# EAGLE board testeserra1 (EAGLE 9.7.0)
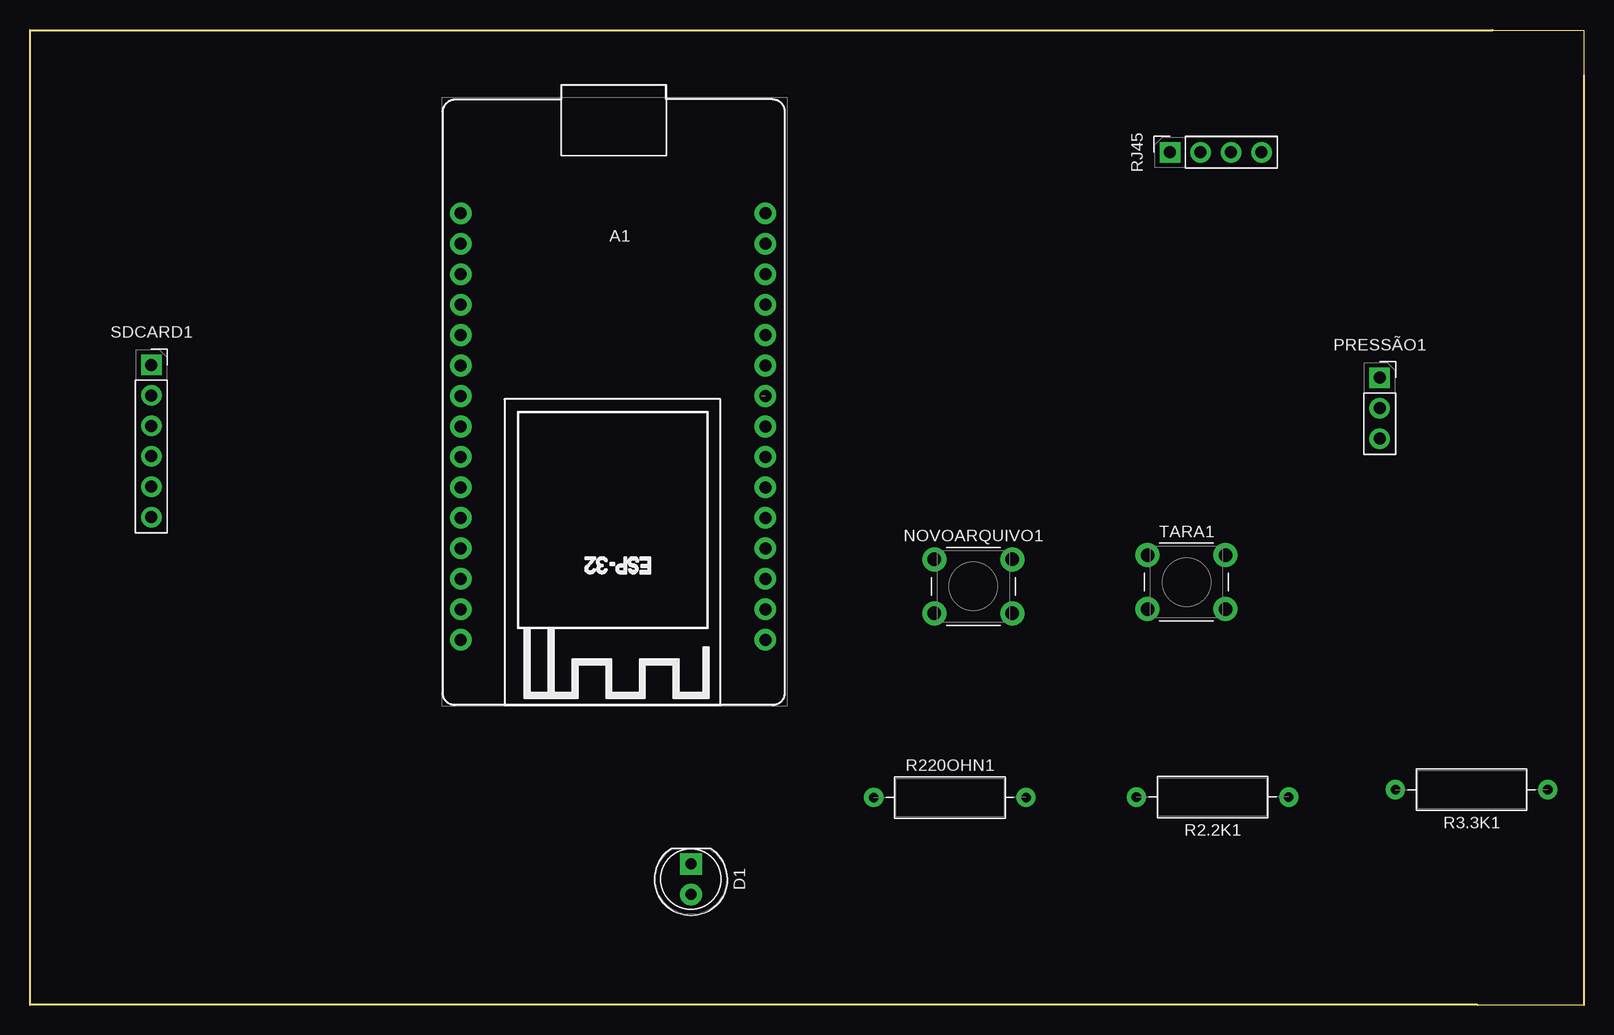
[diagram p0: board, top side]
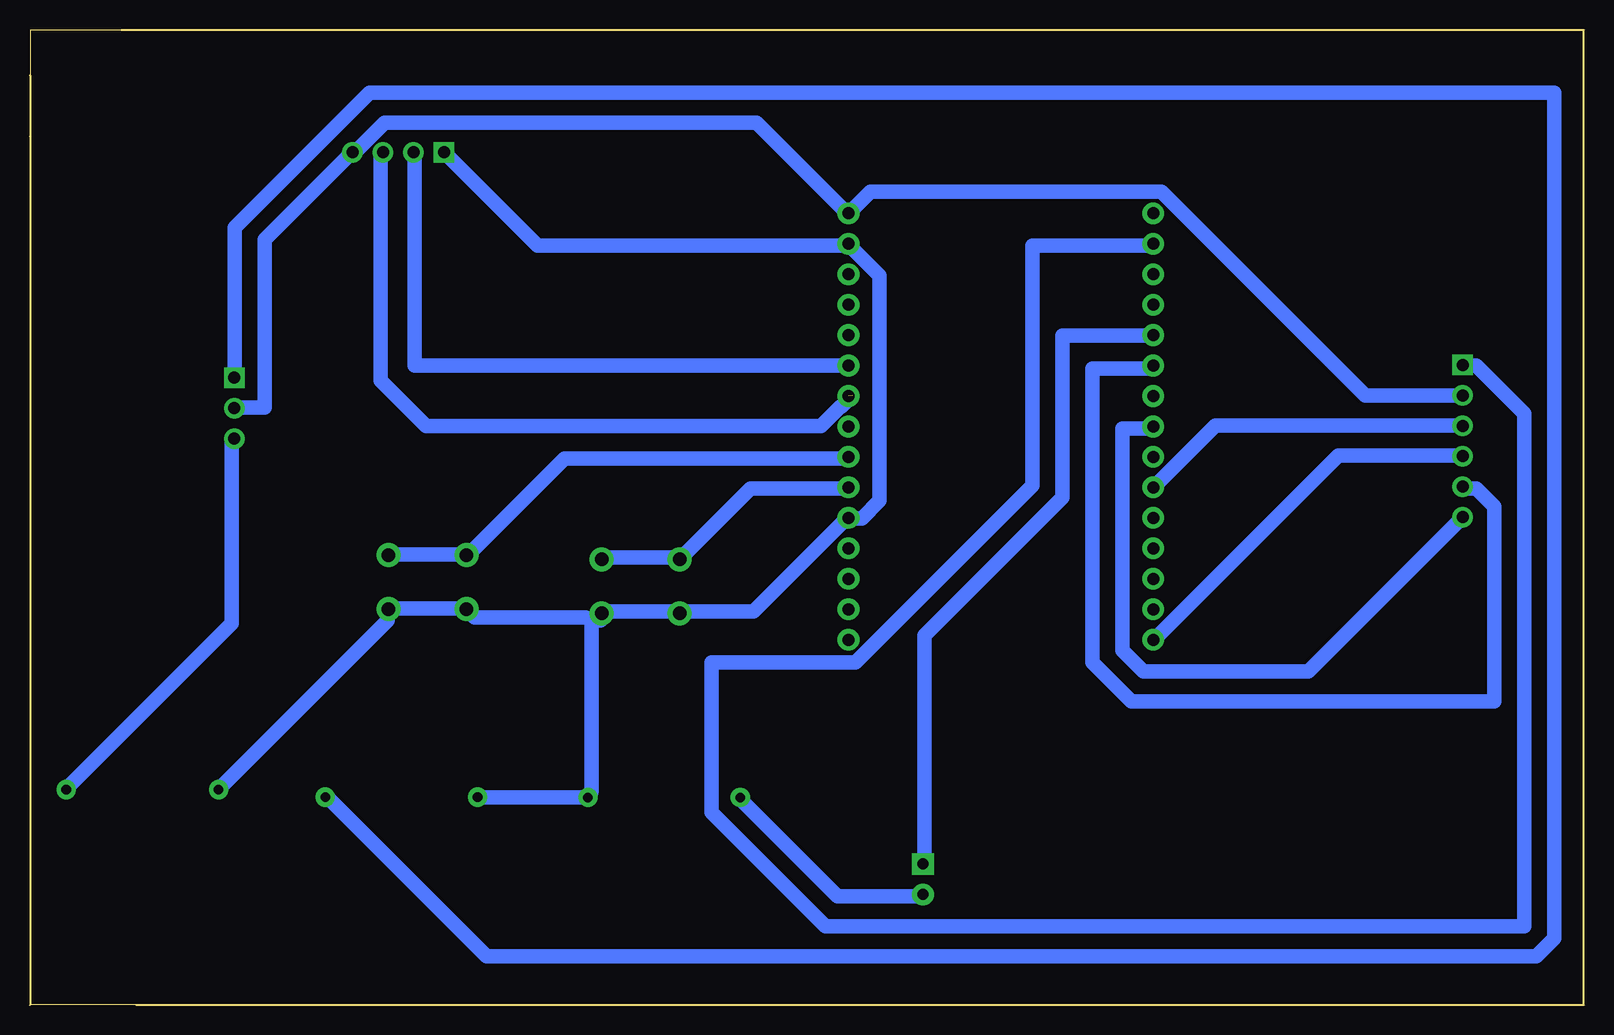
[diagram p1: board, bottom side, seen from below]

Size 129.54 x 81.28 mm. Coordinates in mm from the lower left corner, seen from the top.
Outline: 129.54,77.47 129.54,72.39
Outline: 129.54,72.39 129.54,0 120.65,0 0,0 0,81.28 121.92,81.28 129.54,81.28 129.54,72.39
Copper layers (1*16): Top / Bottom
Stack-up Default Layer Stack: Top SilkScreen Epoxy Ink / Top SolderMask SR:Green 0.0254mm Dk 4.3 / Top Surface Finish Lead-Free 0.02mm / Top CuFoil:007 0.035mm / Dielectric-1 User Defined 1.5mm / Bottom CuFoil:007 0.035mm / Bottom Surface Finish Lead-Free 0.02mm / Bottom SolderMask SR:Green 0.0254mm Dk 4.3 / Bottom SilkScreen Epoxy Ink
Design rules: minimum copper width 1.2mm, minimum drill size 0.35mm, copper clearance wire_polygon to wire_polygon 0.6mm, copper clearance wire_polygon to pad_smd 6mil, copper clearance wire_polygon to via 6mil, copper clearance pad_smd to pad_smd 0.6mm, copper clearance pad_smd to via 6mil, copper clearance via to via 6mil, copper clearance smd to pad (same net) 6mil, copper clearance smd to via (same net) 6mil, copper clearance smd to smd (same net) 6mil, dimension clearance 40mil, via restrict clearance 0mil, restrict clearance 0mil, drill distance 6mil, keepout clearance 0mil

## Footprints (pad centres in the part's own frame; a part is rotated, then mirrored left to right if it is on the bottom)
DOIT_ESP32_DEVKIT_30PINS = drill 1 pad 1.8: 1 0,0; 2 0,-2.54; 3 0,-5.08; 4 0,-7.62; 5 0,-10.16; 6 0,-12.7; 7 0,-15.24; 8 0,-17.78; 9 0,-20.32; 10 0,-22.86; 11 0,-25.4; 12 0,-27.94; 13 0,-30.48; 14 0,-33.02; 15 0,-35.56; 16 25.4,-35.56; 17 25.4,-33.02; 18 25.4,-30.48; 19 25.4,-27.94; 20 25.4,-25.4; 21 25.4,-22.86; 22 25.4,-20.32; 23 25.4,-17.78; 24 25.4,-15.24; 25 25.4,-12.7; 26 25.4,-10.16; 27 25.4,-7.62; 28 25.4,-5.08; 29 25.4,-2.54; 30 25.4,0
LED_D5.0MM_FLATTOP = drill 0.9 pad 1.8 square: 1 0,0 | drill 0.9 pad 1.8: 2 2.54,0
SW_PUSH_6MM = drill 1.1 pad 2: 1_1 0,0; 1_2 6.5,0; 2_1 0,-4.5; 2_2 6.5,-4.5
PINSOCKET_1X03_P2.54MM_VERTICAL = drill 1 pad 1.7 square: 1 0,0 | drill 1 pad 1.7: 2 0,-2.54; 3 0,-5.08
R_AXIAL_DIN0309_L9.0MM_D3.2MM_P12.70MM_HORIZONTAL = drill 0.8 pad 1.6: 1 0,0; 2 12.7,0
PINSOCKET_1X04_P2.54MM_VERTICAL = drill 1 pad 1.7 square: 1 0,0 | drill 1 pad 1.7: 2 0,-2.54; 3 0,-5.08; 4 0,-7.62
PINSOCKET_1X06_P2.54MM_VERTICAL = drill 1 pad 1.7 square: 1 0,0 | drill 1 pad 1.7: 2 0,-2.54; 3 0,-5.08; 4 0,-7.62; 5 0,-10.16; 6 0,-12.7

## Placement (x,y rotation side)
A1  ESP32_DevKit_V1_DOIT_30GPIOs  [DOIT_ESP32_DEVKIT_30PINS]  35.91,66 0 top
D1  LED  [LED_D5.0MM_FLATTOP]  55.1,11.75 270 top
NOVOARQUIVO1  Push_Button  [SW_PUSH_6MM]  75.38,37.15 0 top
PRESSÃO1  Sensor de pressão  [PINSOCKET_1X03_P2.54MM_VERTICAL]  112.51,52.29 0 top
R2.2K1  R  [R_AXIAL_DIN0309_L9.0MM_D3.2MM_P12.70MM_HORIZONTAL]  104.93,17.33 180 top
R3.3K1  R  [R_AXIAL_DIN0309_L9.0MM_D3.2MM_P12.70MM_HORIZONTAL]  126.52,17.94 180 top
R220OHN1  R  [R_AXIAL_DIN0309_L9.0MM_D3.2MM_P12.70MM_HORIZONTAL]  70.33,17.29 0 top
RJ45  conexão do rj45  [PINSOCKET_1X04_P2.54MM_VERTICAL]  95.03,71.08 90 top
SDCARD1  sd card  [PINSOCKET_1X06_P2.54MM_VERTICAL]  10.12,53.36 0 top
TARA1  Push_Button  [SW_PUSH_6MM]  93.16,37.49 0 top

## Library data of the parts
A1 = PCM_SL_Development_Boards; DESCRIPTION: Microcontroller module with ESP32 MCU, WiFi and Bluetooth
D1 = LED_THT; DATASHEET: ~; DESCRIPTION: Light emitting diode; SIM_PINS: 1=K 2=A
NOVOARQUIVO1 TARA1 = Button_Switch_THT; DESCRIPTION: Common 6mmx6mm Push Button
PRESSÃO1 = Connector_PinSocket_2.54mm; DESCRIPTION: Pin Header female with pin space 2.54mm. Pin Count -3
R2.2K1 R3.3K1 R220OHN1 = Resistor_THT; DATASHEET: ~; DESCRIPTION: Resistor
RJ45 = Connector_PinSocket_2.54mm; DESCRIPTION: Pin Header female with pin space 2.54mm. Pin Count -4
SDCARD1 = Connector_PinSocket_2.54mm; DESCRIPTION: Pin Header female with pin space 2.54mm. Pin Count -6

## Nets
NET-(A1-ADC1_CH4{SLASH}D32-PAD21): A1.21 NOVOARQUIVO1.1_1 NOVOARQUIVO1.1_2
NET-(A1-ADC1_CH4{SLASH}D32-PAD22): A1.22 TARA1.1_1 TARA1.1_2
NET-(A1-ADC1_CH7{SLASH}D35): A1.20 A1.29 NOVOARQUIVO1.2_1 NOVOARQUIVO1.2_2 R2.2K1.2 R3.3K1.2 R220OHN1.2 RJ45.1 TARA1.2_1 TARA1.2_2
NET-(A1-ADC2_CH7{SLASH}D27): A1.25 RJ45.2
NET-(A1-D4{SLASH}ADC2_CH0): A1.5 D1.1
NET-(A1-D5): A1.8 SDCARD1.6
NET-(A1-D19): A1.10 SDCARD1.3
NET-(A1-D23): A1.15 SDCARD1.4
NET-(A1-DAC2{SLASH}ADC2_CH9{SLASH}D26): A1.24 RJ45.3
NET-(A1-GND-PAD2): A1.2 SDCARD1.1
NET-(A1-RX2{SLASH}GPIO16): A1.6 SDCARD1.5
NET-(A1-VIN): A1.30 PRESSÃO1.2 RJ45.4 SDCARD1.2
NET-(D1-A): D1.2 R220OHN1.1
NET-(PRESSÃO1-PAD1): PRESSÃO1.1 R2.2K1.1
NET-(PRESSÃO1-PAD3): PRESSÃO1.3 R3.3K1.1
UNCONNECTED-(A1-3.3V-PAD1): A1.1
UNCONNECTED-(A1-ADC1_CH0{SLASH}VP-PAD17): A1.17
UNCONNECTED-(A1-ADC1_CH3{SLASH}VN-PAD18): A1.18
UNCONNECTED-(A1-ADC1_CH6{SLASH}D34-PAD19): A1.19
UNCONNECTED-(A1-ADC2_CH4{SLASH}D13-PAD28): A1.28
UNCONNECTED-(A1-ADC2_CH5{SLASH}D12-PAD27): A1.27
UNCONNECTED-(A1-ADC2_CH6{SLASH}D14-PAD26): A1.26
UNCONNECTED-(A1-D2{SLASH}ADC2_CH2-PAD4): A1.4
UNCONNECTED-(A1-D15{SLASH}ADC2_CH3-PAD3): A1.3
UNCONNECTED-(A1-D18-PAD9): A1.9
UNCONNECTED-(A1-D21{SLASH}SDA-PAD11): A1.11
UNCONNECTED-(A1-D22{SLASH}SCL-PAD14): A1.14
UNCONNECTED-(A1-DAC1{SLASH}ADC2_CH8{SLASH}D25-PAD23): A1.23
UNCONNECTED-(A1-EN-PAD16): A1.16
UNCONNECTED-(A1-RX0{SLASH}GPIO3-PAD12): A1.12
UNCONNECTED-(A1-TX0{SLASH}GPIO1-PAD13): A1.13
UNCONNECTED-(A1-TX2{SLASH}GPIO17-PAD7): A1.7

## Tracks (layer width: path | path; a pad name or v marks a point on that pad's centre or on a via)
NET-(A1-ADC1_CH4{SLASH}D32-PAD21)
  Bottom 1.2: A1.21 61.49,43.07 69.49,43.07 75.24,37.32 NOVOARQUIVO1.1_1 75.99,37.32 81.74,37.32 NOVOARQUIVO1.1_2
NET-(A1-ADC1_CH4{SLASH}D32-PAD22)
  Bottom 1.2: A1.22 61.49,45.57 84.99,45.57 92.99,37.57 TARA1.1_1 93.74,37.57 99.49,37.57 TARA1.1_2
NET-(A1-ADC1_CH7{SLASH}D35)
  Bottom 1.2: RJ45.1 94.99,71.07 87.24,63.32 61.49,63.32 A1.29 60.99,63.07 58.74,60.82 58.74,42.03 60.2,40.57 60.74,40.57 A1.20 61.49,40.57 69.24,32.82 75.24,32.82 NOVOARQUIVO1.2_1 75.99,32.82 81.74,32.82 NOVOARQUIVO1.2_2 81.99,32.07 82.74,32.07 | R3.3K1.2 113.74,18.07 99.74,32.07 99.74,32.82 TARA1.2_2 99.24,33.07 93.24,33.07 TARA1.2_1 92.49,32.32 83.24,32.32 82.74,32.07 | R2.2K1.2 91.99,17.32 83.24,17.32 R220OHN1.2 82.74,17.82 82.74,32.07
NET-(A1-ADC2_CH7{SLASH}D27)
  Bottom 1.2: RJ45.2 97.49,71.07 97.49,53.32 61.49,53.32 A1.25
NET-(A1-D4{SLASH}ADC2_CH0)
  Bottom 1.2: D1.1 54.99,11.82 54.99,30.82 43.49,42.32 43.49,55.82 35.99,55.82 A1.5
NET-(A1-D5)
  Bottom 1.2: SDCARD1.6 10.24,40.57 22.99,27.82 36.74,27.82 38.49,29.57 38.49,48.07 35.99,48.07 A1.8
NET-(A1-D19)
  Bottom 1.2: SDCARD1.3 10.24,48.32 30.74,48.32 35.74,43.32 A1.10
NET-(A1-D23)
  Bottom 1.2: SDCARD1.4 10.24,45.82 20.49,45.82 35.74,30.57 A1.15
NET-(A1-DAC2{SLASH}ADC2_CH9{SLASH}D26)  (1 unrouted)
  Bottom 1.2: RJ45.3 100.33,70.86 100.33,52.07 96.52,48.26 63.6,48.26 61.99,49.87 61.89,49.87 60.96,50.8
NET-(A1-GND-PAD2)
  Bottom 1.2: SDCARD1.1 9.99,53.32 8.99,53.32 4.99,49.32 4.99,6.57 63.24,6.57 72.74,16.07 72.74,28.57 60.74,28.57 45.99,43.32 45.99,63.32 35.99,63.32 A1.2
NET-(A1-RX2{SLASH}GPIO16)
  Bottom 1.2: SDCARD1.5 9.99,43.07 8.99,43.07 7.49,41.57 7.49,25.32 37.74,25.32 40.99,28.57 40.99,53.07 35.99,53.07 A1.6
NET-(A1-VIN)
  Bottom 1.2: PRESSÃO1.2 112.49,49.82 109.99,49.82 109.99,63.82 102.74,71.07 RJ45.4 102.24,71.32 99.99,73.57 68.99,73.57 61.74,66.32 A1.30 61.24,66.07 59.49,67.82 35.24,67.82 18.24,50.82 SDCARD1.2
NET-(D1-A)
  Bottom 1.2: R220OHN1.1 70.24,17.07 62.24,9.07 55.24,9.07 D1.2
NET-(PRESSÃO1-PAD1)
  Bottom 1.2: R2.2K1.1 104.74,17.32 91.49,4.07 3.99,4.07 2.49,5.57 2.49,76.07 101.24,76.07 112.49,64.82 112.49,52.32 PRESSÃO1.1
NET-(PRESSÃO1-PAD3)
  Bottom 1.2: R3.3K1.1 126.49,18.07 112.74,31.82 112.74,47.07 PRESSÃO1.3